# Altium PCB Rectifire_(PFC)_Evaluation_board.PcbDoc
Units mm, origin at the board's own origin, x right, y up, seen from the top; angles counter-clockwise.
Board outline 50.01 x 103.15 mm, 2 copper layers (Top Layer, Bottom Layer); 118 components, 41 nets, 233 pads, 20 vias.
Unrouted connection lines stored in the file: 152.
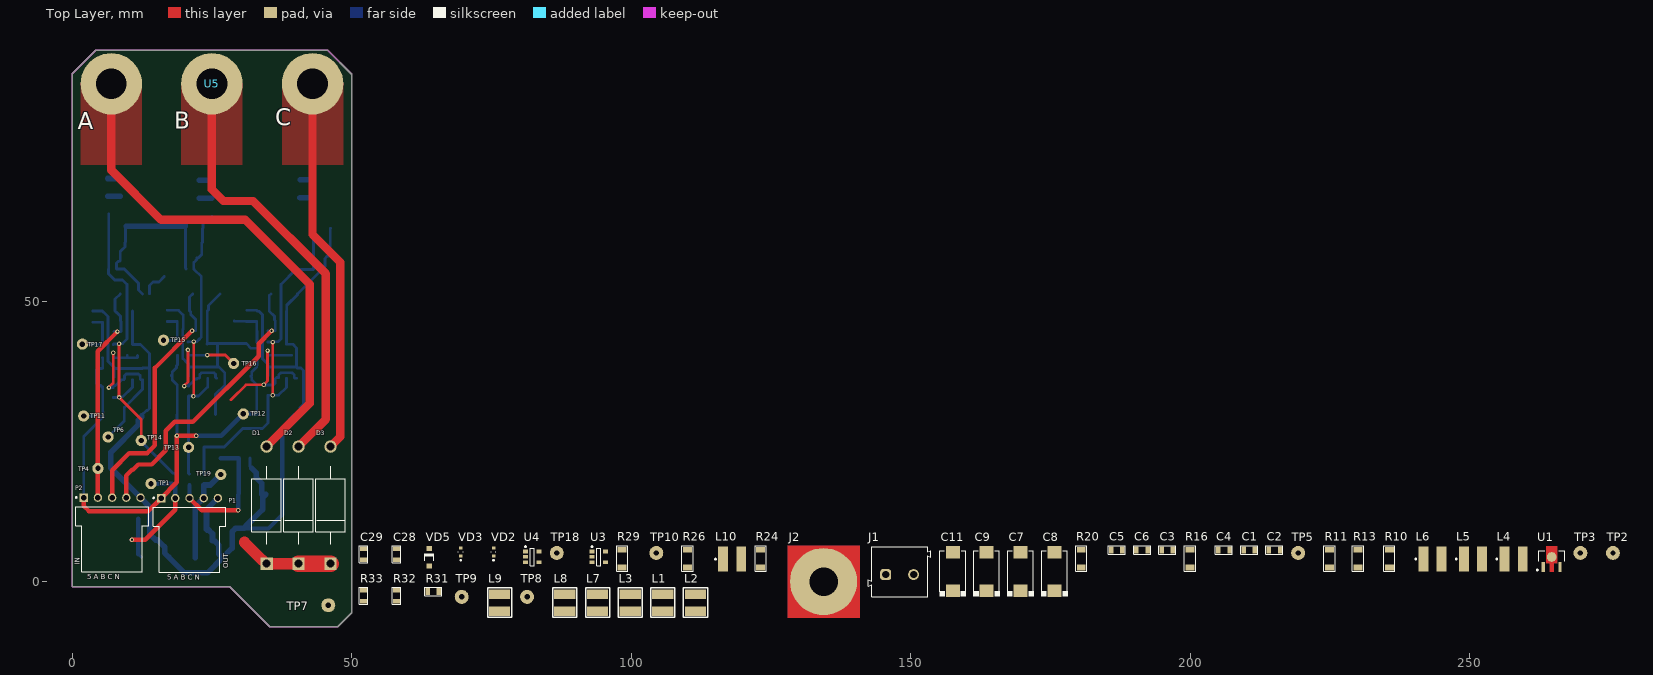
[diagram p0: Top Layer view]
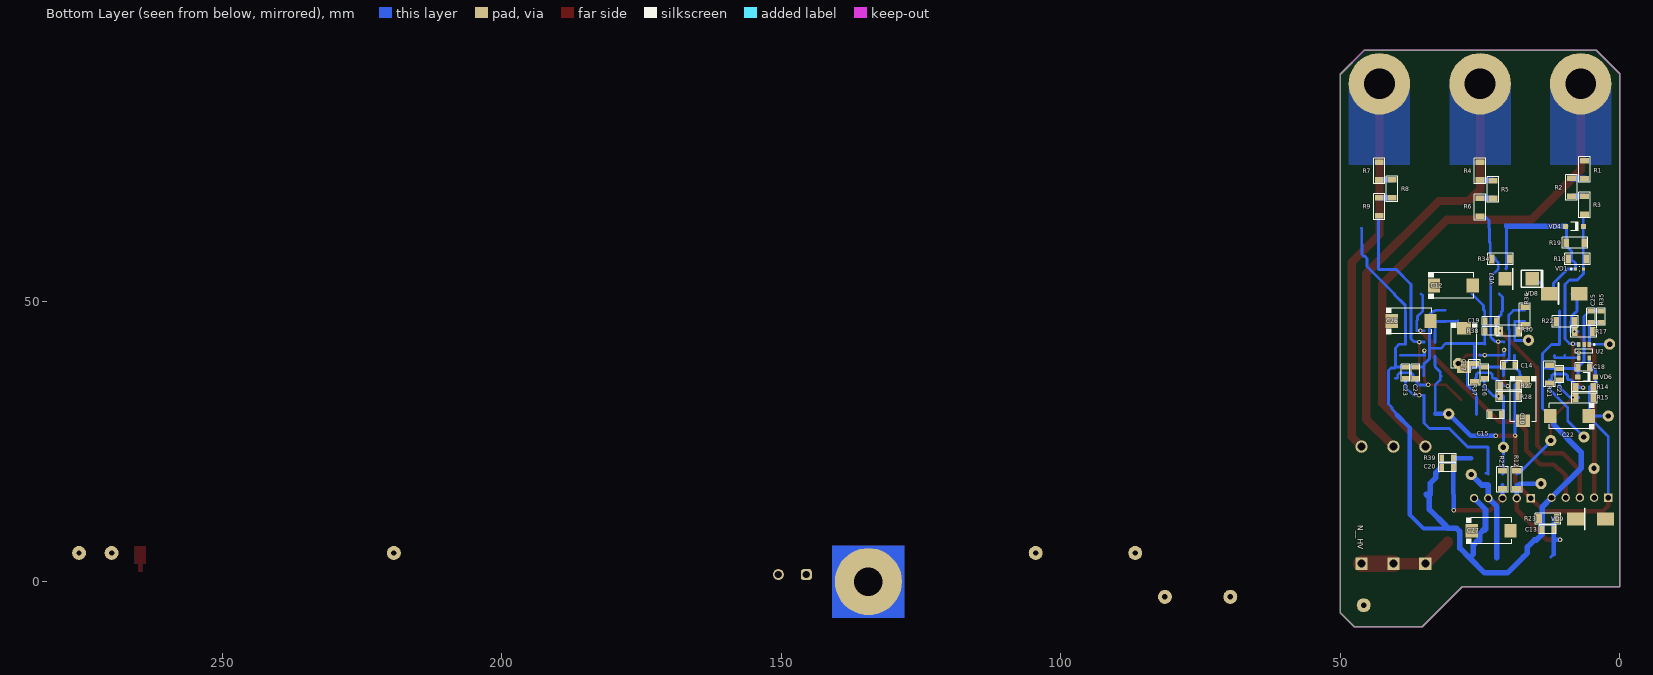
[diagram p1: Bottom Layer view, seen from below]

## Layer stack, top to bottom
Top Solder: solder mask 0.0102, Solder Resist, Dk 3.5
Top Layer: signal copper 0.0356
Dielectric 1: dielectric 0.32, FR-4, Dk 4.8
Bottom Layer: signal copper 0.0356
Bottom Solder: solder mask 0.0102, Solder Resist, Dk 3.5

## Board outline
0,-1 0,90.75 4.25,95 45.7,95 50.014,90.686 50.014,-5.636 47.504,-8.146 35.346,-8.146 28.2,-1

## Design rules (kind name [scope] priority, off if disabled: settings)
Clearance [All] p1: gap=0.254 ignorepadtopadclearanceinfootprint=FALSE except(0: SMDPad-Hole THPad-Hole Via-Hole Fill-Hole Poly-Hole Region-Hole Text-Hole; 0.2: Arc-Arc Arc-Track Arc-SMDPad Arc-THPad Arc-Via Arc-Fill Arc-Poly Arc-Region Arc-Text Arc-Hole Track-Track Track-SMDPad Track-THPad Track-Via Track-Fill Track-Poly Track-Region Track-Text Track-Hole)
PlaneConnect [All] p1: planeconnectstyle=Direct reliefexpansion=0.508 reliefentries=4 reliefconductorwidth=0.4 reliefairgap=0.254
PolygonConnect [All] p1: connectstyle=Direct reliefconductorwidth=0.5 reliefentries=4 polygonreliefangle="90 Angle" airgapwidth=0.254
RoutingVias [All] p1: holewidth=0.711 width=1.27 viastyle="Through Hole" minholewidth=0.711 minwidth=1.27 maxholewidth=0.711 maxwidth=1.27
SolderMaskExpansion [All] p1: expansion=0.102 istentingtop=FALSE
SupplyNets "Schematic Supply Nets_1" [InNet('GND')] p1: voltage=0.000
SupplyNets "Schematic Supply Nets" [InNet('+3V3')] p2: voltage=0.000
Width [All] p1: maxlimit=5 minlimit=0.254 preferedwidth=0.254
29 further rules are at their usual default settings.

## Classes and differential pairs
component class Rectifire_(PFC)_Evaluation_Board: C1 C2 C3 C4 C5 C6 C7 C8 C9 C10 C11 C12 C13 C14 C15 C16 C17 C18 C19 C20 C21 C22 C23 C24 C25 C26 C27 C28 C29 D1 D2 D3 J1 J2 L5 L6 L7 L8 L9 L10 P1 P2 R1 R2 R3 R4 R5 R6 R7 R8 R9 R10 R11 R12 R13 R14 R15 R16 R17 R18 R19 R20 R21 R22 R23 R24 R25 R26 R27 R28 R29 R30 R36 R37 R38 R39 TP1 TP2 TP3 TP4 TP5 TP6 TP7 TP10 TP13 TP18 TP19 U1 U2 U3 U4 U5 VD1 VD2 VD3 VD4 VD5 VD6 VD7 VD8 VD9

## Components (designator, comment, footprint, x,y, rotation, side; value= is the part's Value field where it differs from the comment)
C1 "0.1uF" CAP-0805 210.55,5.58 r0 top
C2 "0.1uF" CAP-0805 215.05,5.58 r0 top
C3 "0.1uF" CAP-0805 195.899,5.58 r0 top
C4 "0.1uF" CAP-0805 206.025,5.58 r0 top
C5 "0.1uF" CAP-0805 186.874,5.58 r0 top
C6 "0.1uF" CAP-0805 191.374,5.58 r0 top
C7 "50uF" CAP-TAN-D 169.648,1.755 r90 top
C8 "50uF" CAP-TAN-D 175.723,1.755 r90 top
C9 "50uF" CAP-TAN-D 163.573,1.755 r90 top
C10 "50uF" CAP-TAN-D 17.3,32.175 r270 bottom
C11 "50uF" CAP-TAN-D 157.522,1.755 r90 top
C12 "50uF" CAP-TAN-D 29.8,52.9 r180 bottom
C13 "470pF" CAP-0805 12.879,9.276 r180 bottom
C14 "470pF" CAP-0805 19.812,38.688 r180 bottom
C15 "470pF" CAP-0805 22.225,29.798 r0 bottom
C16 "0.1uF" CAP-0805 24.257,37.291 r270 bottom
C17 "50uF" CAP-TAN-D 27.875,41.775 r270 bottom
C18 "0.1uF" CAP-0805 6.477,38.307 r180 bottom
C19 "0.1uF" CAP-0805 23.114,46.562 r180 bottom
C20 "0.1uF" CAP-0805 30.84,20.363 r180 bottom
C21 "470pF" CAP-0805 10.795,37.037 r270 bottom
C22 "50uF" CAP-TAN-D 9.025,29.55 r0 bottom
C23 "470pF" CAP-0805 38.354,37.291 r270 bottom
C24 "470pF" CAP-0805 36.576,37.291 r270 bottom
C25 "470pF" CAP-0805 5.207,47.324 r270 bottom
C26 "50uF" CAP-TAN-D 37.338,46.562 r180 bottom
C27 "50uF" CAP-TAN-D 23.039,9.022 r180 bottom
C28 "470pF" CAP-0805 58.018,4.805 r90 top
C29 "470pF" CAP-0805 52.167,4.805 r90 top
D1 "FR-207" FP-DO-201AD-MFG 34.798,13.604 r90 top locked
D2 "FR-207" FP-DO-201AD-MFG 40.513,13.604 r90 top locked
D3 "FR-207" FP-DO-201AD-MFG 46.228,13.604 r90 top locked
J1 "691101710002" 691101710002 148.022,1.68 r0 top
J2 "Klema_15_A" Connector_6mm 134.421,-0.07 r0 top
L1 "Coil" NR4030 105.67,-3.82 r0 top
L2 "Coil" NR4030 111.52,-3.82 r0 top
L3 "Coil" NR4030 99.845,-3.82 r0 top
L4 "12µH, 1.28A" WE-PD2_4532 257.827,3.955 r0 top
L5 "12µH, 1.28A" WE-PD2_4532 250.577,3.955 r0 top
L6 "12µH, 1.28A" WE-PD2_4532 243.327,3.955 r0 top
L7 "Coil" NR4030 93.994,-3.82 r0 top
L8 "Coil" NR4030 88.144,-3.82 r0 top
L9 "Coil" NR4030 76.468,-3.82 r0 top
L10 "12µH, 1.28A" WE-PD2_4532 118.07,3.955 r0 top
P1 "61900511021" 61900511021 21.007,7.414 r0 top locked
P2 "61900511021" 61900511021 7.164,7.498 r0 top locked
R1 "300K 1%" RES-1206 6.35,73.613 r90 bottom
R2 "300K 1%" RES-1206 8.636,70.438 r90 bottom
R3 "300K 1%" RES-1206 6.35,67.263 r90 bottom
R4 "300K 1%" RES-1206 25.019,73.359 r90 bottom
R5 "300K 1%" RES-1206 22.733,70.057 r90 bottom
R6 "300K 1%" RES-1206 25.019,66.882 r90 bottom
R7 "10K 1%" RES-1206 43.053,73.359 r90 bottom
R8 "10K 1%" RES-1206 40.767,70.184 r90 bottom
R9 "10K 1%" RES-1206 43.05,66.975 r90 bottom
R10 "10K 1%" RES-1206 235.601,4.055 r90 top
R11 "300K 1%" RES-1206 224.901,4.055 r90 top
R12 "10K 1%" RES-1206 18.467,18.166 r90 bottom
R13 "10K 1%" RES-1206 230.001,4.055 r90 top
R14 "300K 1%" RES-1206 6.35,34.624 r180 bottom
R15 "300K 1%" RES-1206 6.35,32.846 r180 bottom
R16 "10K 1%" RES-1206 199.924,4.055 r90 top
R17 "10K 1%" RES-1206 6.477,44.657 r180 bottom
R18 "10K 1%" RES-1206 7.62,57.611 r180 bottom
R19 "10K 1%" RES-1206 8.001,60.532 r180 bottom
R20 "10K 1%" RES-1206 180.499,4.055 r90 top
R21 "10K 1%" RES-1206 12.573,37.037 r270 bottom
R22 "300K 1%" RES-1206 9.779,46.435 r180 bottom
R23 "300K 1%" RES-1206 12.879,11.181 r180 bottom
R24 "300K 1%" RES-1206 123.171,4.055 r90 top
R25 "300K 1%" RES-1206 21.007,18.166 r90 bottom
R26 "300K 1%" RES-1206 110.095,4.055 r90 top
R27 "300K 1%" RES-1206 19.812,34.878 r180 bottom
R28 "300K 1%" RES-1206 19.812,33.1 r180 bottom
R29 "300K 1%" RES-1206 98.395,4.055 r90 top
R30 "300K 1%" RES-1206 19.812,44.784 r180 bottom
R31 "10K" RES-0805 64.618,-1.845 r0 top
R32 "10K" RES-0805 58.018,-2.62 r90 top
R33 "10K" RES-0805 52.167,-2.62 r90 top
R34 "10K 1%" RES-1206 21.336,57.611 r0 bottom
R35 "10K" RES-0805 3.429,47.324 r270 bottom
R36 "10K 1%" RES-1206 17.018,47.451 r270 bottom
R37 "10K 1%" RES-1206 26.035,37.291 r270 bottom
R38 "10K" RES-0805 23.114,44.784 r180 bottom
R39 "10K" RES-0805 30.84,22.014 r180 bottom
TP1 "Test_Point_PCB" Test_Point#1 14.125,17.45 r0 top
TP2 "Test_Point_PCB" Test_Point#2 275.603,5.055 r0 top
TP3 "Test_Point_PCB" Test_Point#2 269.778,5.055 r0 top
TP4 "Test_Point_PCB" Test_Point#1 4.625,20.175 r0 top
TP5 "Test_Point_PCB" Test_Point#2 219.3,5.055 r0 top
TP6 "Test_Point_PCB" Test_Point#1 6.45,25.8 r0 top
TP7 "Test_Point_PCB" Pin_Test_Point(Pink) 45.825,-4.3 r0 top
TP8 "Test_Point_PCB" Pin_Test_Point(Pink) 81.394,-2.795 r0 top
TP9 "Test_Point_PCB" Pin_Test_Point(Pink) 69.693,-2.795 r0 top
TP10 "Test_Point_PCB" Test_Point#2 104.495,5.055 r0 top
TP11 "Test_Point_PCB" Test_Point#1 2.075,29.55 r0 top
TP12 "Test_Point_PCB" Test_Point#1 30.625,29.925 r90 top
TP13 "Test_Point_PCB" Test_Point#1 20.85,23.95 r90 top
TP14 "Test_Point_PCB" Test_Point#1 12.375,25.15 r0 top
TP15 "Test_Point_PCB" Test_Point#1 16.35,43.1 r90 top
TP16 "Test_Point_PCB" Test_Point#1 28.9,38.95 r90 top
TP17 "Test_Point_PCB" Test_Point#1 1.85,42.4 r0 top
TP18 "Test_Point_PCB" Test_Point#2 86.694,5.055 r90 top
TP19 "Test_Point_PCB" Test_Point#1 26.6,19.075 r90 top
U1 "AMS1117" SOT-89 264.653,4.33 r0 top
U2 "" SOT-23-5 6.416,41.158 r270 bottom
U3 "" SOT-23-5 94.219,4.355 r0 top
U4 "" SOT-23-5 82.294,4.355 r0 top
U5 "" MDS100 25.014,98.972 r0 top
VD1 "5.0V" SOD-323 7.239,55.833 r180 bottom
VD2 "5.0V" SOD-323 75.393,5.23 r90 top
VD3 "5.0V" SOD-323 69.543,5.23 r90 top
VD4 "5.1V" DIOD-SOD123-2_V 8.128,63.453 r180 bottom
VD5 "5.1V" DIOD-SOD123-2_V 63.893,4.28 r90 top
VD6 "5.1V" DIOD-SOD123-2_V 5.969,36.529 r180 bottom
VD7 "3.3V" DO-214AA#1 20.175,54.075 r180 bottom
VD8 "3.3V" DO-214AA#2 12.25,51.425 r180 bottom
VD9 "3.3V" DO-214AA#2 7.55,11.125 r180 bottom

## Footprints (in the part's own frame and the unit in brackets; to place one, negate y for a bottom-side part, rotate by r counter-clockwise, add the part's x,y. Pads: shape width x height; smd on the part's side, far side on the other; paste and mask are expansions set on the pad)
61900511021 [mm] "2.54mm Male Left Angled Header Bottom Locking, 5p"
  rect 1.5x1.5 hole 1: 1(-5.08,7.45)
  round 1.5 hole 1: 2(-2.54,7.45) 3(0,7.45) 4(2.54,7.45) 5(5.08,7.45)
  silkscreen extent -6.53,-5.82 6.52,7.62, body extent -6.35,-5.75 6.35,7.77, height 5.83
691101710002 [mm] "5,00mm - modular - blue - Horizontal entry with pressure clamp - 12,6mm height - 02p"
  rrect50% 1.95x1.95 hole 1.3: 1(-2.5,-0.5)
  round 1.95 hole 1.3: 2(2.5,-0.5)
  silkscreen extent -5.6,-4.5 5.6,4.5, body extent -5.6,-4.5 5.6,4.5, height 12.65
CAP-0805 [mm]
  rect 0.8x1.25 smd mask+0.015: 1(-1,0) 2(1,0)
  silkscreen extent -1.52,-0.76 1.52,0.76, body extent -1,-0.62 1,0.63, height 0.8
CAP-TAN-D [mm]
  rect 2.2x2.5 smd: 1(-3.45,0) 2(3.45,0)
  silkscreen extent -4.5,-2.4 3.65,2.4, body extent -3.8,-2.3 3.8,2.3, height 4
Connector_6mm [mm]
  round 12 hole 5.1: 1(0,0)
  Top Layer region: -6.5,-6.5 6.5,-6.5 6.5,6.5 -6.5,6.5
  Bottom Layer region: -6.5,-6.5 6.5,-6.5 6.5,6.5 -6.5,6.5
DIOD-SOD123-2_V [mm] "SOD123, 2-Leads, Body 2.7x1.55mm, Height 1.45mm"
  rect 0.9x0.95 smd: 1(1.575,0) 2(-1.575,0)
  silkscreen extent -0.64,-0.82 0.64,0.77, body extent -1.88,-0.8 1.88,0.8, height 1.3
DO-214AA#1 [mm]
  rect 2.4x2.4 smd: 1(-0.381,0) 2(4.5,0)
  silkscreen extent 1.02,-1.91 6.35,1.91, body extent -0.75,-1.97 4.85,1.97, height 2.65
DO-214AA#2 [mm]
  rect 3x2.4 smd: 1(-0.381,0) 2(4.953,0)
  silkscreen extent 1.27,-1.91 1.27,1.91, body extent -0.53,-1.85 5.07,2.1, height 2.65
FP-DO-201AD-MFG [mm]
  rect 2.2x2.2 hole 1.45 paste-2539.97 mask+0: 1(-10.47,0)
  round 2.2 hole 1.45 paste-2539.97 mask+0: 2(10.47,0)
  silkscreen extent -7,-2.65 7,2.65, body extent -11.67,-2.75 11.67,2.75, height 0.25
MDS100 [mm]
  round 11 hole 5.5: 1(-18,-10) 2(0,-10) 3(18,-10)
  body extent -40,-20 40,20
NR4030 [mm]
  rect 3.8x1.7 smd: 1(0,1.524) 2(0,-1.524)
  silkscreen extent -2.16,-2.67 2.16,2.67, body extent -2,-2 2,2, height 3.15
Pin_Test_Point(Pink) [mm]
  round 2.5 hole 0.95: 1(0,0)
  body extent -1.3,-1.78 1.3,1.78, height 6.93
RES-0805 [mm]
  rect 0.8x1.25 smd mask+0.015: 1(-1,0) 2(1,0)
  silkscreen extent -1.52,-0.76 1.52,0.76, body extent -1,-0.62 1,0.63, height 0.6
RES-1206 [mm]
  rect 1x1.6 smd: 1(-1.6,0) 2(1.6,0)
  silkscreen extent -2.29,-1.02 2.29,1.02, body extent -1.6,-0.8 1.6,0.8, height 0.6
SOD-323 [mm]
  rect 0.5x0.6 smd paste-1000 mask+0: 1(-0.7,0) 2(0.7,0)
  silkscreen extent -1.6,-0.43 0.08,0.43, body extent -0.8,-0.39 0.8,0.41, height 0.7
SOT-23-5 [mm]
  rect 0.9x0.65 smd: 1(-1.2,0.95) 2(-1.2,0) 3(-1.2,-0.95) 4(1.2,-0.95) 5(1.2,0.95)
  silkscreen extent -1.32,-1.55 0.35,1.95, body extent -1.4,-1.45 1.4,1.45, height 1.24
SOT-89 [mm]
  rect 0.58x1.73 smd paste+0 mask+0: 1(-1.5,-1.781) 3(1.5,-1.781)
  round 1.74 smd paste+0 mask+0: 2(0,0)
  Top Layer region: -0.38,-2.646 -0.38,-1.146 -0.967,-1.146 -0.967,1.884 0.967,1.884 0.967,-1.146 0.38,-1.146 0.38,-2.646
  silkscreen extent -2.7,-2.47 2.3,1.15, body extent -2.4,-2.75 2.4,1.98, height 0.25
Test_Point#1 [mm]
  round 2 hole 0.95: 1(0,0)
Test_Point#2 [mm]
  round 2.5 hole 0.95: 1(0,0)
WE-PD2_4532 [mm] "SMD Power Inductor, 2-Leads, body 4.5x4mm"
  rect 1.75x4.5 smd: 1(-1.625,0) 2(1.625,0)
  silkscreen extent -3.12,-0.12 -2.87,0.12, body extent -2.25,-2 2.25,2, height 3.22

## Part data
C1 C2 C3 C4 C5 C6 C13 C14 C15 C16 C18 C19 C20 C21 C23 C24 C25 C28 C29: library part CAP-NON-POLAR
C7 C8 C9 C10 C11 C12 C17 C22 C26 C27: library part CAP-POLAR
D1 D2 D3: "FR207"
J1: "WR-TBL Series 101 Horizontal Entry Modular, THT, pitch 5mm, 2p", Manufacturer="Wurth Elektronik", Operating Temperature Max=105°C, Operating Temperature Min=-40°C, Rated Current=16A, Working Voltage=250V, Application="Pressure Clamp", Category="Terminal Blocks", ComponentLink1Description="Website Link", ComponentLink1URL=https://www.we-online.com/redexpert/article/691101710002?ad, ComponentLink2Description="Datasheet Link", ComponentLink2URL=https://www.we-online.com/redexpert/spec/691101710002?ad, Manufacturer Part Number=691101710002, Match Code=WR-TBL, Modularity=Yes, Mount="Through Hole", Number of Pins=2, Number of Rows=1, Orientation=Horizontal, Packaging=Box, Pitch=5mm
L4 L5 L6 L10: library part 744773112, "WE-PD2 SMT Power Inductor, size 4532, 12µH, 1.28A, 0.21Ω", Case/Size Code=4532, DC Resistance=0.156Ω, DC Resistance Max=0.21Ω, Inductance=12µH, Manufacturer="Wurth Elektronik", Operating Temperature Max=125°C, Operating Temperature Min=-40°C, Rated Current=1.28A, Saturation Current=1.62A, Self Resonant Frequency=32MHz, Category="Unshielded Power Inductors", ComponentLink1Description="Website Link", ComponentLink1URL=https://www.we-online.com/redexpert/article/744773112?ad, ComponentLink2Description="Datasheet Link", ComponentLink2URL=https://www.we-online.com/redexpert/spec/744773112?ad, Height=3.2mm, Length=4.5mm, Manufacturer Part Number=744773112, Match Code=WE-PD2, Mount="Surface Mount", Packaging="Tape and Reel", Width=4mm, Simulation ModelName=4532_744773112_12u, Simulation ModelText=".subckt 4532_744773112_12u 1 2 / Rp 1 2 21000 / Cp 1 2 2.27p / Rs 1 N3 0.156 / L1 N3 2 12u / .ends 4532_744773112_12u", Simulation PortMap=(1:1),(2:2)
P1 P2: "WR-WTB THT Male Left Angled Bottom Locking Header, pitch 2.54mm, 5p", Contact Resistance=20mOhm, Operating Temperature="-40 to +105degC", Rated Current=3A, Withstanding Voltage=1000VAC, Working Voltage=250VAC, ComponentLink1Description=Manufacturer, ComponentLink1URL=http://www.we-online.de, ComponentLink2Description=Datasheet, ComponentLink2URL=https://www.we-online.com/catalog/datasheet/61900511021.pdf, Gender=Male, Mounting Technology=THT, Packaging=Bag, Part Number=61900511021, Pin Number=5, Pitch=2.54mm, Published Date="January 2020", Publisher="Wurth Elektronik", Type="Right Angled Bottom Locking"
R1 R2 R3 R4 R5 R6 R11 R14 R15 R22 R23 R24 R25 R26 R27 R28 R29 R30: library part RES-CONST, "300K"
R7 R9 R12 R31 R32 R33 R34 R35 R36 R37 R38 R39: library part RES-CONST
R8 R10 R13 R16 R17 R18 R19 R20 R21: library part RES-CONST, "10K"
TP1 TP2 TP3 TP4 TP5 TP6 TP7 TP8 TP9 TP10 TP11 TP12 TP13 TP14 TP15 TP16 TP17 TP18 TP19: library part TP_PCB?, "Test_Point"
U2 U3 U4: library part MCP6001T, "IC OPAMP GP 1 CIRCUIT SOT23-5", Case/Package=SOT-23, Input Bias Current=1pA, Input Offset Voltage (Vos)=4.5mV, Max Operating Temperature=85°C, Max Supply Voltage=6V, Min Operating Temperature=-40°C, Min Supply Voltage=1.8V, Nominal Supply Current=100uA, Operating Supply Voltage=5.5V, Output Current=23mA, Package Quantity=1, Power Supply Rejection Ratio (PSRR)=86dB, Voltage Gain=112dB, Bandwidth=1MHz, Common Mode Rejection Ratio=60dB, Contact Plating=Tin, Gain Bandwidth Product=1MHz, Height=1.3mm, Lead Free="Lead Free", Length=3.1mm, Mount="Surface Mount", Number of Amplifiers=1, Number of Channels=1, Number of Circuits=1, Number of Elements=1, Number of Pins=5, Operating Supply Current=100uA, Output Current per Channel=23mA, Packaging="Tape and Reel", Radiation Hardening=No, REACH SVHC="No SVHC", Slew Rate=0.6V/µs, Unity Gain Bandwidth Product=1MHz, Voltage=6V, Width=1.8mm
U5: library part MDS100, Case/Package=SOIC, Dual Supply Voltage=9V, Input Bias Current=250nA, Input Offset Voltage (Vos)=7mV, Max Dual Supply Voltage=16V, Max Operating Temperature=70°C, Max Supply Voltage=32V, Min Dual Supply Voltage=1.5V, Min Operating Temperature=0°C, Min Supply Voltage=3V, Nominal Supply Current=1.2mA, Operating Supply Current=1.5mA, Output Current=40mA, Package Quantity=2500, Power Supply Rejection Ratio (PSRR)=65dB, Voltage Gain=100dB, Bandwidth=1MHz, Common Mode Rejection Ratio=65dB, Contact Plating=Tin, Gain Bandwidth Product=1MHz, Halogen Free="Halogen Free", Height=1.5mm, Lead Free="Lead Free", Length=5mm, Number of Amplifiers=2, Number of Channels=2, Number of Circuits=2, Number of Elements=2, Number of Pins=8, Operating Supply Voltage=16V, Output Current per Channel=40mA, Packaging="Tape and Reel", Radiation Hardening=No, REACH SVHC="No SVHC", Slew Rate=0.6V/µs, Width=4mm
VD1 VD2 VD3: library part SMBJ15A
VD4 VD5 VD6: library part ZENER
VD7 VD8 VD9: library part Suppressor

## Via types
v1: diameter 0.8, hole 0.4, Top Layer to Bottom Layer, tented both sides, 19 vias
v2: diameter 0.8, hole 0.4, Top Layer to Bottom Layer, 1 vias

## Nets (pads, with @x,y where several pads share a name; then routed paths per layer and width w, separated by ;. In a path a pad name is that pad's centre, name@x,y a point inside that pad or via, vN(x,y) a via of type N, cw(c..) or ccw(c..) an arc to the next point about the centre after c; other vN are vias at no path point)
+3V3: C2.2 C4.2 C6.2 C8.1 C10.1 C12.1 L4.2 L5.2 L6.2 U1.2
GND: C1.1 C2.1 C3.1 C4.1 C5.1 C6.1 C7.2 C8.2 C9.2 C10.2 C11.2 C12.2 C13.1 C14.1 C15.1 C16.1 C17.2 C18.1 C19.1 C20.1 C21.1 C22.2 C23.1 C24.1 C25.1 C26.2 C27.2 C28.1 C29.1 L7.1 R16.1 R17.1 R18.1 R19.1 R20.1 R21.1 R34.1 R35.1 R36.1 R37.1 R38.1 R39.1 TP7.1 U1.1 U2.2 U2.4 U3.2 U3.4 U4.2 U4.4 VD1.1 VD2.1 VD3.1 VD4.2 VD5.2 VD6.2 VD7.1 VD8.1 VD9.1 | length 300.1
  Bottom Layer w0.5: R35.1@3.683,48.308 5.461,48.308 5.461,48.295 5.582,48.174 5.595,48.174 6.416,47.353 6.416,44.657 U2.2 6.416,39.339 7.477,38.278 7.477,38.053 C18.1@7.485,38.045 ; VD6.2 7.511,36.562 7.511,38.02 C18.1@7.485,38.045 ; VD4.2 9.577,63.327 9.577,60.658 9.452,60.532 9.452,59.781 9.099,59.429 9.063,59.429 8.62,58.986 8.62,57.611 8.62,57.386 8.47,57.236 8.292,57.236 7.939,56.883 VD1.1 9.342,55.833 11.875,53.3 11.875,52.086 VD8.1@12.573,51.388 ; 10.819,48.313 10.819,42.356 10.844,42.332 12.231,42.332 13.843,40.72 13.843,38.114 ; C22.2@12.467,29.544 12.467,29.694 13.317,30.544 13.467,30.544 13.843,30.92 13.843,38.114 ; VD8.1@13.798,51.398 13.825,51.425 13.825,52.873 14.475,53.523 15.546,53.523 16.496,54.473 ; 17.018,48.451 17.026,48.459 18.788,48.459 ; 18.796,48.451 19.021,48.451 19.871,47.601 19.871,45.053 19.812,44.994 19.812,42.809 19.812,39.831 20.58,39.063 20.662,39.063 20.846,38.88 C14.1@20.846,38.43 ; 20.382,55.833 20.382,55.883 20.269,55.996 20.269,63.453 20.269,63.58 20.269,63.605 20.469,63.805 20.494,63.805 ; 20.879,36.783 20.846,36.816 C14.1@20.846,38.43 ; 24.156,42.419 24.169,42.432 24.169,42.452 ; 25.675,29.798 25.675,33.45 27.325,35.1 27.325,37.226 26.975,37.575 26.26,38.291 26.035,38.291 ; 26.471,51.388 24.381,49.298 24.381,48.54 24.181,48.34 24.169,48.328 24.169,46.562 24.169,44.784 24.169,42.452 ; 30.825,9.495 30.895,9.425 ; 31.242,48.451 33.02,48.451 33.171,48.3 33.396,48.3 34.036,47.66 34.036,42.809 ; R39.1 31.84,20.506 C20.1@32.108,20.238 ; 34.036,42.682 34.036,41.65 ; 35.036,38.688 35.036,38.59 35.208,38.418 ; 35.036,38.913 34.886,39.063 34.759,39.063 34.036,39.786 34.036,41.65 ; 35.103,36.783 35.103,38.186 35.208,38.291 C24.1 C23.1 40.132,38.291 ; 39.92,29.775 39.92,29.925 40.77,30.775 40.77,31.071 41.402,31.703 41.402,37.672 40.933,38.141 40.282,38.141 40.132,38.291 ; 40.306,51.4 45.225,56.319 45.225,57.5 45.225,57.725 45.633,58.133 45.858,58.133 46.151,58.426 46.151,60.25 46.188,60.287 46.188,63.088 46.225,63.125 ; 40.38,51.326 38.405,49.352 38.405,48.34 38.372,48.306 38.372,46.596 38.338,46.562 38.338,45.419 38.354,45.403 38.354,42.371 39.497,42.371 40.132,41.736 40.132,38.291 ; C18.1@7.485,38.045 10.795,38.045 12.565,38.045 12.573,38.037 12.65,38.114 13.843,38.114 ; C14.1@20.846,38.43 20.984,38.291 22.479,38.291 C16.1 26.035,38.291 ; 24.169,42.452 24.215,42.498 26.035,42.498 ; 26.035,38.291 R37.1 26.035,42.498 ; 26.035,42.498 28.752,42.498 31.173,42.498 32.021,41.65 34.036,41.65
  Bottom Layer w0.8: 30.895,9.425 35.125,9.425 37.625,11.925 37.625,27.48 39.92,29.775
  Bottom Layer w1: VD4.2 20.269,63.453 ; C22.2@12.467,29.544 12.467,29.392 11.867,28.792 11.867,27.992 6.925,23.05 6.925,20.279 12.244,14.96 12.244,14.948 13.879,13.313 13.879,11.181 C13.1 13.879,8.454 14.962,7.371 15.292,7.371 16.552,6.111 16.552,5.055 17.252,4.355 20.107,1.5 24.208,1.5 26.904,4.196 ; 24.165,9.134 24.06,9.252 24.039,9.276 24.039,10.8 24.039,12.816 26.087,14.864 ; 24.302,9.285 25.049,8.538 25.122,8.465 25.122,7.244 25.452,7.244 26.214,6.482 26.214,4.886 26.904,4.196 ; 30.825,9.495 30.792,9.462 29.237,9.462 28.625,8.85 28.625,5.917 26.904,4.196 ; 31.075,9.825 34.075,12.825 34.075,14.962 34.3,15.187 34.65,15.537 ; C20.1@32.108,20.238 32.923,19.423 32.923,18.585 32.923,18.534 33.95,17.507 33.95,15.537
NetC1_2: C1.2 C7.1 L4.1 R7.2 R8.2 TP1.1
NetC3_2: C3.2 C9.1 L5.1 R9.2 R10.2 TP2.1
NetC5_2: C5.2 C11.1 L6.1 R12.2 R13.2 TP3.1
NetC13_2: C13.2 P1.2 R7.1 R8.1 R11.1 R16.2 R17.2 TP4.1 | length 27.1
  Top Layer w0.8: v2(10.7,7.425) 10.725,7.4 13.075,7.4 18.467,12.792 P1.2
  Bottom Layer w0.5: 11.879,4.847 12.371,4.355 ; C13.2 C13.2@11.879,9.435
  Bottom Layer w0.8: v2(10.7,7.425) 11.762,7.425 11.812,7.375 11.812,7.371 11.879,7.371 ; 11.879,4.847 11.879,7.371 ; C13.2 11.879,7.371 ; C13.2@11.879,9.435 11.879,11.181 ; 14.125,17.45 17.958,17.45 18.242,17.166 18.467,17.166 P1.2@18.467,14.864
NetC14_2: C14.2 P1.4 R9.1 R10.1 R14.1 R18.2 R19.2 TP5.1
NetC15_2: C15.2 P1.3 R12.1 R13.1 R15.1 R20.2 R21.2 TP6.1
NetC16_2: C16.2 C17.1 L10.2 P1.1 P2.1 TP10.1 U1.3 | length 56.2
  Top Layer w0.5: v1(21.7,33.1) 21.75,33.15 v1(21.75,42.85) v1@21.763,42.863
  Bottom Layer w0.5: 20.762,42.809 20.782,42.83 21.729,42.83 21.781,42.881 22.346,42.881 22.64,43.175 22.65,43.175 23.125,43.65 23.125,54.49 21.832,55.783 21.782,55.783 21.782,57.032 22.236,57.486 ; 21.007,19.166 20.962,19.166 20.812,19.316 20.812,23.95 20.812,33.1 v1(21.7,33.1) 22.606,33.1 24.257,34.751 C16.2 ; 22.336,57.611 22.336,57.836 22.561,57.836 23.19,58.465 23.19,60.481 ; 23.211,60.502 23.241,60.532 23.343,60.634 23.343,63.107 23.399,63.162 23.399,63.56 ; 23.399,63.611 23.425,63.611 ; 23.419,63.58 23.419,64.52 23.931,65.032 24.82,65.032 25.019,65.231
NetC18_2: C18.2 C19.2 C20.2 C22.1 C26.1 C27.1 L10.1 TP11.1 TP12.1 TP13.1 U2.5 U3.5 U4.5 | length 102.4
  Top Layer w0.8: 2.084,14.948 2.108,14.924 2.108,13.467 3.025,12.55 13.613,12.55 15.927,14.864 18.75,17.687 v1(18.75,26.05) 18.8,26 v1(22.225,26)
  Bottom Layer w0.5: TP11.1 5.561,29.55 5.567,29.544 5.567,29.394 2.084,25.911 2.084,14.948 ; 5.35,34.624 5.35,34.849 5.2,34.999 4.74,34.999 4.394,35.345 4.394,36.529 4.394,37.754 4.687,38.047 5.327,38.047 C18.2@5.472,38.191 ; U2.5 5.472,39.953 C18.2@5.472,38.191 ; 5.472,34.751 5.472,34.122 5.477,34.116 5.477,30.269 C22.1@5.567,30.179 ; C18.2@5.472,38.077 C18.2@5.472,38.191 ; C18.2 5.477,38.197 C18.2@5.472,38.191 ; v1(18.75,26.05) 18.75,29.773 18.812,29.835 18.812,33.1 18.812,34.878 18.812,35.103 17.929,35.986 17.929,36.583 17.729,36.783 17.929,36.983 17.929,37.44 18.662,38.173 18.662,38.538 18.812,38.688 18.837,38.713 18.837,40.384 18.862,40.409 ; 32.886,35.266 32.153,35.999 32.153,36.456 31.953,36.656 32.153,36.856 32.153,37.453 33.036,38.336 33.036,38.561 33.061,38.586 33.061,40.257 33.086,40.282 ; 33.02,29.925 33.036,29.941 33.036,33.227 33.036,35.005
  Bottom Layer w0.8: v1(22.225,26) 26.7,26 TP12.1 33.02,29.925
NetC21_2: C21.2 R28.1 R34.2 TP14.1 U2.3 VD1.2 VD4.1 | length 61
  Top Layer w0.5: v1(8.4,42.475) 8.4,32.925 v1(8.45,32.875) 12.375,28.95 TP14.1 TP14.1@12.375,24.75
  Bottom Layer w0.5: VD1.2 6.539,54.986 7.645,53.88 9.045,53.88 9.825,53.1 9.825,43.3 9.013,42.488 8.413,42.488 v1(8.4,42.475) 8.343,42.418 7.426,42.418 U2.3 ; VD1.2@6.553,55.847 6.553,57.611 VD4.1 6.553,65.663 ; 7.35,32.846 7.364,32.861 v1@8.436,32.861 ; v1(8.45,32.875) 8.501,32.926 9.026,32.926 10.795,34.695 C21.2 ; TP14.1@12.318,24.813 12.562,24.813 18.059,19.316 18.317,19.316 18.467,19.166 ; TP14.1@12.529,25.402 TP14.1@12.529,25.679
NetC23_2: C23.2 R29.1 R36.2 TP15.1 U3.3 VD2.2 VD5.1 | length 67.4
  Top Layer w0.5: v1(35.9,33.275) v1(35.9,42.775)
  Bottom Layer w0.5: 23.547,19.166 23.586,19.205 ; 23.991,19.316 23.697,19.316 23.586,19.205 ; 34.986,42.809 35.003,42.792 35.883,42.792 v1(35.9,42.775) 35.957,42.832 36.832,42.832 37.35,43.35 37.35,53.1 40,55.75 43.175,55.75 43.175,65.25 43.05,65.375 ; C23.2 38.354,34.679 36.95,33.275 v1(35.9,33.275) 35.876,33.251 35.06,33.251 35.036,33.227 35.036,28.286 34.05,27.3 30.525,27.3 27.225,24 23.625,24 23.586,23.961 23.586,19.205
NetC24_2: C24.2 R30.1 R37.2 TP16.1 U4.3 VD3.2 VD6.1 | length 26.5
  Top Layer w0.5: 28.45,32.45 31.125,35.125 v1(34.275,35.125) 34.975,35.825 v1(34.975,41.25)
  Bottom Layer w0.5: v1(34.275,35.125) 34.332,35.068 35.018,35.068 35.035,35.084 36.002,35.084 36.295,35.377 36.295,36.141 36.595,36.441 36.951,36.441 36.951,36.904 37.338,37.291 39.37,37.291 39.757,36.904 39.757,36.441 39.907,36.291 40.132,36.291 ; v1(34.975,41.25) 34.98,41.244 34.98,40.414 34.986,40.409 ; 35.121,40.418 37.439,40.418 39.269,40.418
NetC25_2: C25.2 P2.2 R31.1 R35.2 TP17.1 VD7.2 | length 9.4
  Bottom Layer w0.5: TP17.1 1.871,42.379 5.445,42.379 5.464,42.36 5.464,46.305 5.461,46.308 R35.2@3.683,46.308
NetC28_2: C28.2 P2.4 R32.1 R38.2 TP18.1 VD8.2 | length 52.5
  Top Layer w0.8: P2.4 9.704,18.898 10.725,19.919 10.894,19.919 11.85,20.875 14.25,20.875 16.775,23.4 16.775,26.9 18.375,28.5 21.625,28.5 33.375,40.25 33.375,42.472 v1(35.687,44.784)
  Bottom Layer w0.5: 35.036,44.784 v1(35.687,44.784) 36.338,44.784 36.338,46.562 36.188,46.712 36.188,47.382 35.255,48.315 35.255,51.083 35.56,51.388
NetC29_2: C29.2 P2.3 R33.1 R39.2 TP19.1 VD9.2
NetD1_1: D1.1 D2.1 D3.1 J1.1 | length 17
  Top Layer w1: D1.1@34.046,3.734 34.198,3.734 D1.1
  Top Layer w2: 30.825,6.955 D1.1@34.046,3.734 ; D1.1 D2.1
  Top Layer w3: D2.1 D3.1
NetD1_2: D1.2 L1.1 R22.2 U5.1 | length 91.6
  Top Layer w1.5: U5.1 7.014,73.536 15.925,64.625 31,64.625 42.5,53.125 42.5,31.776 D1.2
NetD2_2: D2.2 L3.1 R24.2 U5.2 | length 78.5
  Top Layer w1.5: U5.2 25.014,70.061 27.075,68 32.4,68 45.375,55.025 45.375,28.936 D2.2
NetD3_2: D3.2 L2.1 R23.2 U5.3 | length 67.7
  Top Layer w1.5: U5.3 43.014,62.011 48,57.025 48,25.846 D3.2
NetJ1_2: J1.2 L8.2
NetJ2_1: J2.1 L9.1 TP9.1
NetL1_2: L1.2 R1.2
NetL2_2: L2.2 R2.2
NetL3_2: L3.2 R3.2
NetL7_2: L7.2 L8.1 L9.2 P1.5 P2.5 TP8.1
NetR1_1: R1.1 R4.2 | length 2.3
  Bottom Layer w0.5: R1.1 R1.1@6.362,72.025 ; 8.623,72.025 8.636,72.038
  Bottom Layer w1: R1.1@6.362,72.025 8.623,72.025
NetR2_1: R2.1 R5.2 | length 2.3
  Bottom Layer w0.5: 6.35,68.863 6.363,68.85 ; R2.1@8.624,68.85 R2.1
  Bottom Layer w1: 6.363,68.85 R2.1@8.624,68.85
NetR3_1: R3.1 R6.2
NetR4_1: R4.1 R11.2 | length 2.3
  Bottom Layer w0.5: 22.733,71.657 22.784,71.708 ; R4.1@24.968,71.708 R4.1
  Bottom Layer w1: 22.784,71.708 R4.1@24.968,71.708
NetR5_1: R5.1 R14.2 | length 2.3
  Bottom Layer w0.5: R5.1 R5.1@22.745,68.469 ; 25.006,68.469 25.019,68.482
  Bottom Layer w1: R5.1@22.745,68.469 25.006,68.469
NetR6_1: R6.1 R15.2
NetR22_1: R22.1 R25.2
NetR23_1: R23.1 R26.2
NetR24_1: R24.1 R27.2
NetR25_1: R25.1 R28.2
NetR26_1: R26.1 R29.2
NetR27_1: R27.1 R30.2
NetR31_2: R31.2 U2.1
NetR32_2: R32.2 U3.1
NetR33_2: R33.2 U4.1
copper on no net: | length 205.5
  Top Layer w0.5: v1(6.604,34.624) 6.604,34.705 7.363,35.464 7.363,35.845 7.366,35.848 v1(7.366,40.847) ; v1(20.05,34.9) 20.05,34.981 20.725,35.656 v1(20.725,41.375) ; v1(24.175,40.45) 27.4,40.45 28.9,38.95
  Top Layer w0.8: 4.575,14.997 4.575,20.775 4.575,41.112 v1(8.12,44.657) ; 7.164,14.948 7.164,19.839 10.25,22.925 13.425,22.925 14.825,24.325 14.825,38.146 v1(21.463,44.784) ; 21.007,14.864 23.196,12.675 v1(29.725,12.675)
  Bottom Layer w0.5: 6.45,25.8 9.35,28.7 9.35,31.1 12.573,34.323 12.573,36.037 12.348,36.037 12.198,36.187 12.198,36.744 11.905,37.037 9.685,37.037 9.392,36.744 9.392,36.187 9.242,36.037 ; v1(6.604,34.624) 7.35,34.624 ; v1(7.366,40.847) 7.366,39.958 9.821,39.958 9.88,40.017 ; 7.379,34.624 7.379,34.878 7.5,34.999 7.754,34.999 8.792,36.037 9.017,36.037 ; 7.477,44.657 v1(8.12,44.657) 8.763,44.657 ; 8.636,51.388 7.696,50.448 7.696,48.315 7.896,48.115 7.921,48.115 8.647,47.389 8.647,46.567 8.779,46.435 8.771,46.427 8.771,44.665 ; 9.88,40.378 9.88,40.017 ; 11.71,40.378 11.71,40.021 11.647,39.958 9.939,39.958 9.88,40.017 ; 16.075,43.075 18.804,43.075 18.829,43.1 18.829,44.784 18.829,46.434 18.796,46.467 18.788,46.459 17.026,46.459 17.018,46.451 ; v1(20.725,41.375) 20.743,41.357 20.743,40.427 20.762,40.409 25.014,40.409 25.071,40.466 ; 20.812,34.878 20.812,35.103 20.962,35.253 21.187,35.253 22.075,36.141 22.329,36.141 22.479,36.291 22.704,36.291 22.854,36.441 22.854,36.998 23.147,37.291 25.367,37.291 25.66,36.998 25.66,36.441 25.81,36.291 ; v1(21.463,44.784) 22.114,44.784 22.114,46.787 21.231,47.67 21.231,48.14 21.031,48.34 21.031,50.829 21.59,51.388 ; 29,46.525 29.025,46.5 31.125,46.5 31.15,46.475 ; 31.242,46.451 33.02,46.451 33.028,46.443 33.028,44.792 33.036,44.784 33.061,44.759 33.061,42.707 33.086,42.682
  Bottom Layer w0.8: 21.007,14.864 21.007,17.166 ; 26.625,22.025 26.63,22.02 29.84,22.02 29.84,22.014 29.84,20.363 29.84,18.585 ; v1(29.725,12.675) 29.725,15.493 29.769,15.537 29.84,15.608 29.84,18.493 29.823,18.51 29.823,18.585
  Bottom Layer w1: 22.023,4.196 22.023,13.34 23.547,14.864 23.547,17.166 ; 23.672,17.199 24.724,17.199 26.6,19.075 ; 40.772,68.579 43.046,68.579 ; 40.78,71.771 43.041,71.771

## Polygon pours and split planes (outlines as drawn)
NetD3_2 on Bottom Layer "NONET_L-01_P-001" (solid, pour order 5): 37.592,89.028 48.514,89.028 48.514,74.502 37.592,74.502
NetD2_2 on Bottom Layer "NONET_L-01_P-001" (solid, pour order 4): 19.525,89.154 30.447,89.154 30.447,74.502 19.525,74.502
NetD1_2 on Bottom Layer "NONET_L-01_P-001" (solid, pour order 3): 1.524,89.107 12.446,89.107 12.446,74.502 1.524,74.502
NetD1_2 on Top Layer "NONET_L-01_P-001" (solid, pour order 0): 1.524,89.107 12.446,89.107 12.446,74.502 1.524,74.502
NetD3_2 on Top Layer "NONET_L-01_P-001" (solid, pour order 2): 37.592,89.028 48.514,89.028 48.514,74.502 37.592,74.502
NetD2_2 on Top Layer "NONET_L-01_P-001" (solid, pour order 1): 19.525,89.154 30.447,89.154 30.447,74.502 19.525,74.502

## Keep-outs
Keep-Out Layer:
  lines w0.254: 47.504,-8.146 35.346,-8.146 28.2,-1 0,-1 0,90.75 4.25,95 45.7,95 50.014,90.686

## Silkscreen, mask and mechanical layers (free items; w line width, h text height)
Top Overlay:
  text "IN" at 1.371,2.904 h0.9 r90
  text "OUT" at 27.921,2.354 h0.9 r90
  text "5 A B C N" at 2.679,0.379 h0.9
  text "5 A B C N" at 17.029,0.279 h0.9
Bottom Overlay:
  text "N__HV" at 46.854,9.971 h1 r90

## Text inside footprints (layer, text, board x,y; h text height)
U5: Top Overlay "A" at 1,80.836 h3; Top Overlay "B" at 18.272,80.963 h3; Top Overlay "C" at 36.306,81.471 h3